# Altium PCB CPU_PCB.PcbDoc
Units mm, origin at the board's own origin, x right, y up, seen from the top; angles counter-clockwise.
Board outline 30 x 17 mm, 2 copper layers (Top Layer, Bottom Layer), stack 1.071 mm thick; 63 components, 51 nets, 168 pads, 59 vias.
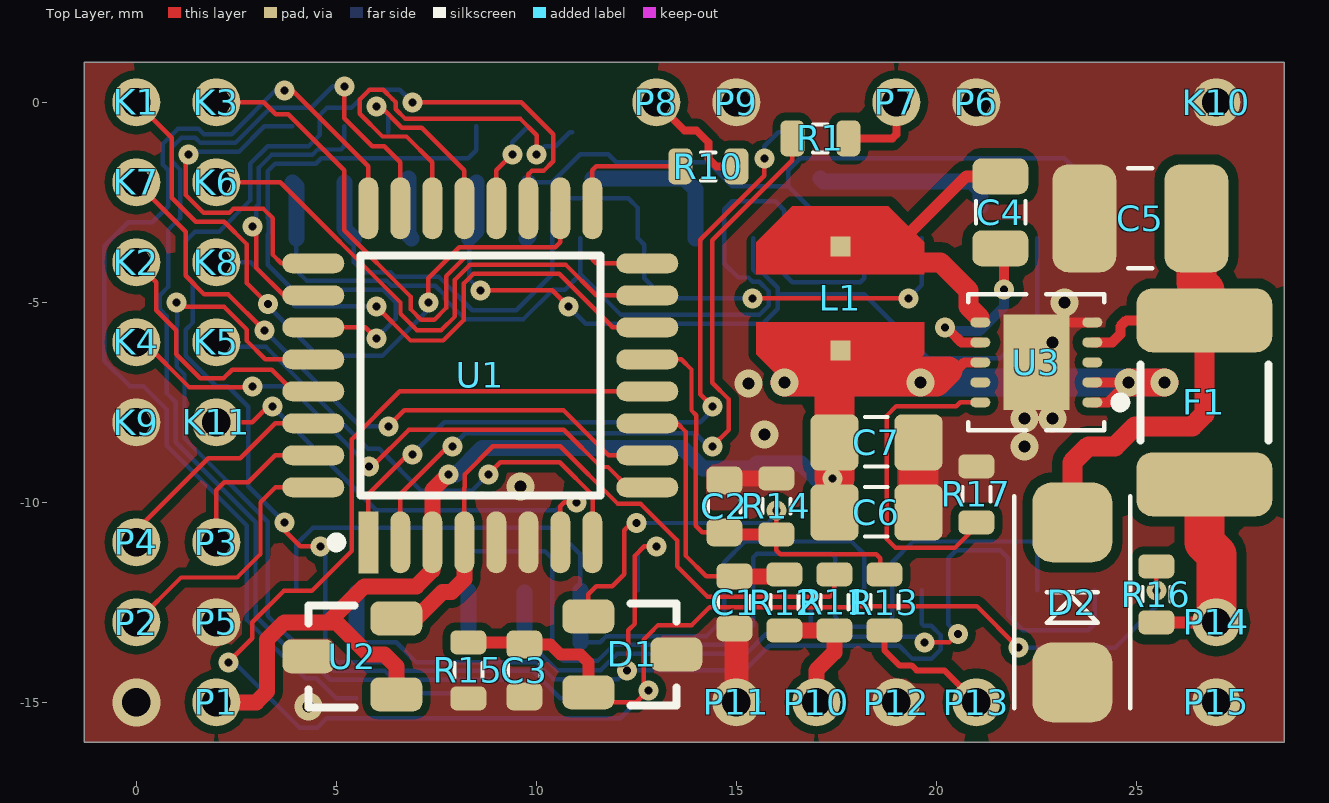
[diagram p0: Top Layer view]
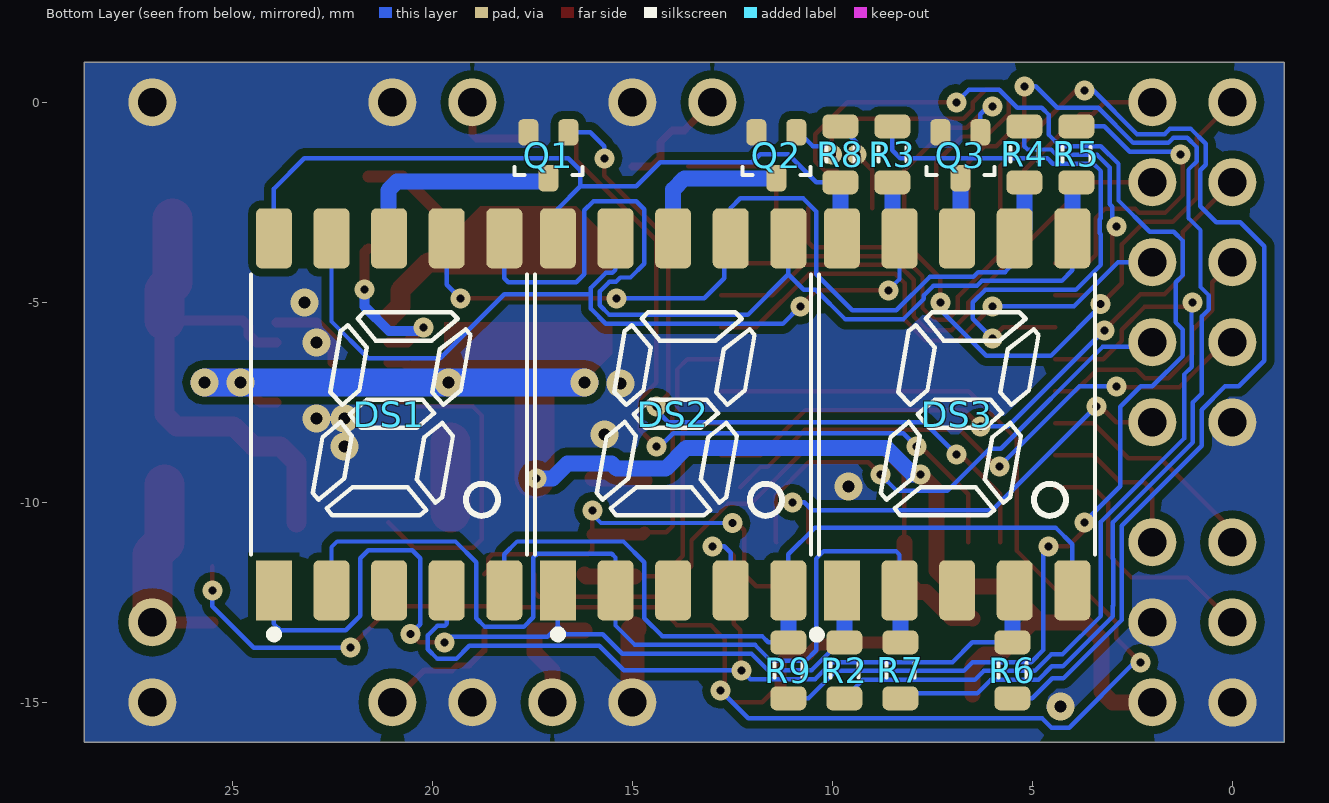
[diagram p1: Bottom Layer view, seen from below]
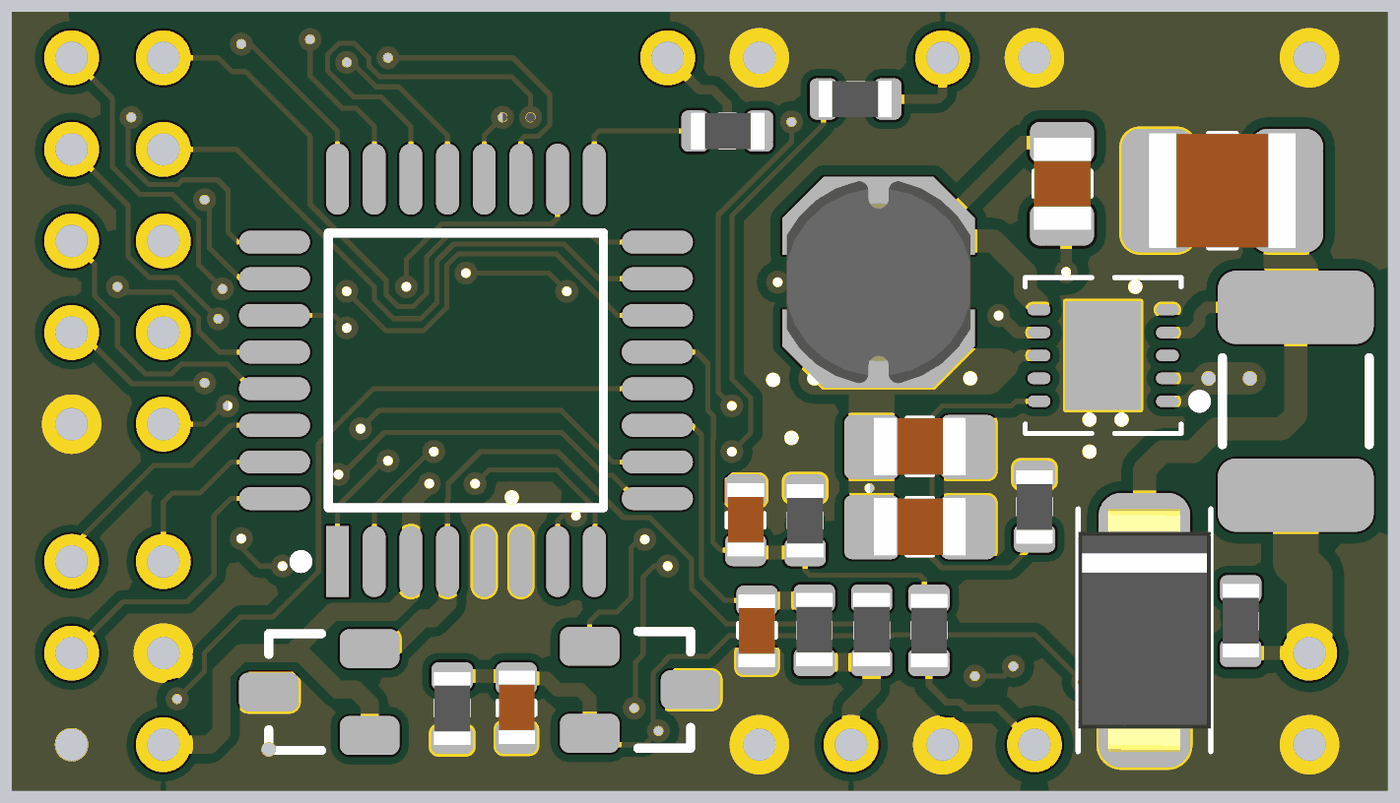
[diagram p2: 3D render of the assembled board from above, using the file's embedded part models]
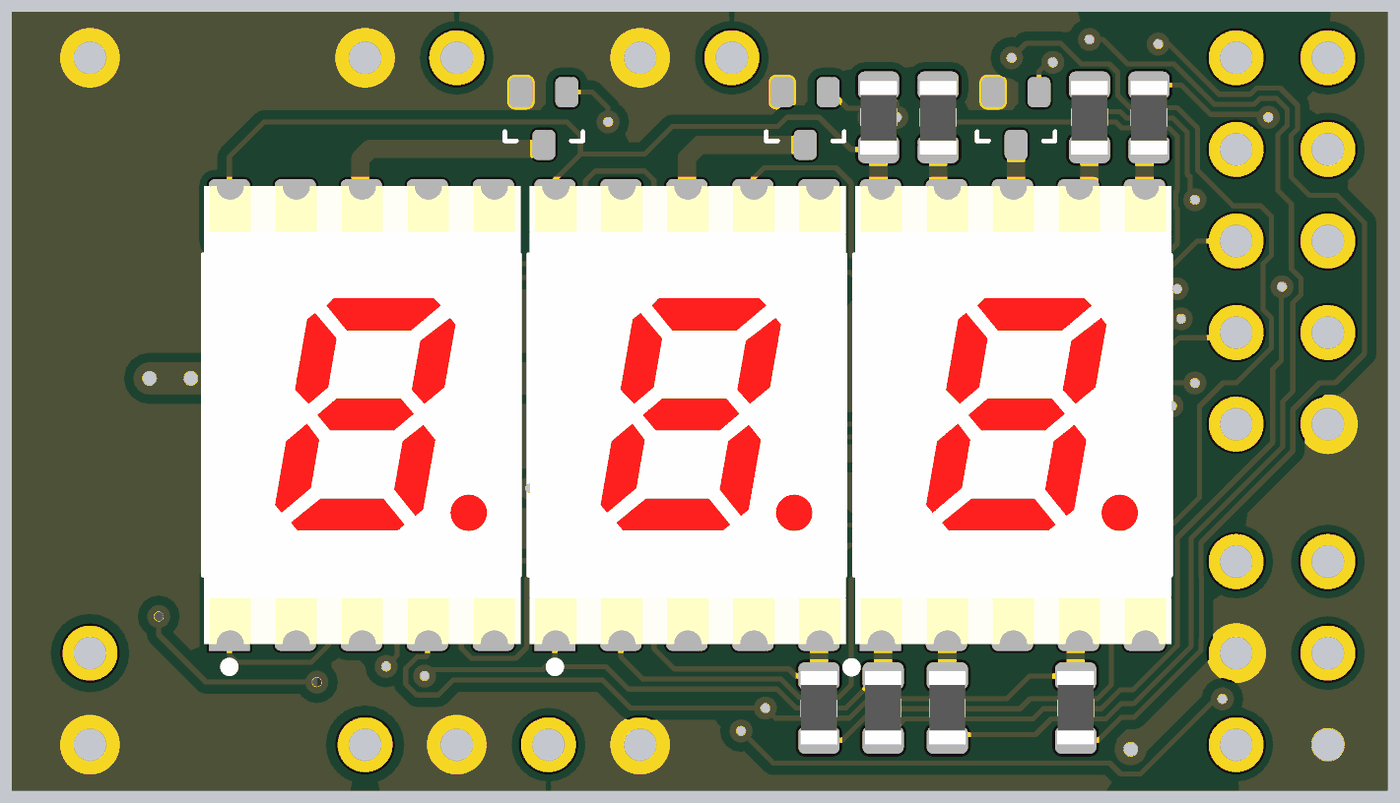
[diagram p3: 3D render of the assembled board from below, using the file's embedded part models]

## Layer stack, top to bottom
Top Solder: solder mask 0.0102, Solder Resist, Dk 3.5
Top Layer: signal copper 0.0356
Dielectric 1: dielectric 1, FR-4, Dk 4.8
Bottom Layer: signal copper 0.0356
Bottom Solder: solder mask 0.0102, Solder Resist, Dk 3.5

## Board outline
-1.3,-16 28.7,-16 28.7,1 -1.3,1

## Design rules (kind name [scope] priority, off if disabled: settings)
Clearance NET24V [All vs InNetClass('24V')] p1: gap=0.25
Clearance Poly [(InNamedPolygon('BOT_GND') OR InNamedPolygon('TOP_GND'))] p2: gap=0.2
Clearance [All] p3: gap=0.11
ComponentClearance [All] p1: gap=0.254 collisioncheckmode=3 verticalgap=0 showdistances=FALSE
HoleSize [All] p1: absolutevalues=TRUE maxlimit=3 minlimit=0.15 maxpercent=80.000 minpercent=20.000
HoleToHoleClearance [All] p1: gap=0.1 allowstackedmicrovias=TRUE
MinimumSolderMaskSliver [All] p1: minsoldermaskwidth=0
PolygonConnect [All] p1: connectstyle=Direct reliefconductorwidth=0.254 reliefentries=4 polygonreliefangle="90 Angle" airgapwidth=0.254
RoutingVias [All] p1: holewidth=0.15 width=0.4 viastyle="Through Hole" minholewidth=0.2 minwidth=0.5 maxholewidth=3 maxwidth=5
SilkToSilkClearance [All] p1: silktosilkclearance=0
SilkToSolderMaskClearance [IsPad] p1: minsilkscreentomaskgap=0 clearancetoexposedcopper=TRUE
SolderMaskExpansion [All] p1: expansion=0.05
Width [All] p1: maxlimit=5 minlimit=0.11 preferedwidth=0.11
23 further rules are at their usual default settings.

## Classes and differential pairs
net class 24V: NetC4_1 NetC4_2 NetC5_1 NetF1_1 NetP13_1

## Components (designator, comment, footprint, x,y, rotation, side; value= is the part's Value field where it differs from the comment)
C1 "CL10B102KB8NNNC" 1608[0603]#1 14.95,-12.5 r270 top
C2 "CL10B102KB8NNNC" 1608[0603]#2 14.7,-10.1 r90 top
C3 "CL10B102KB8NNNC" 1608[0603]#2 9.7,-14.2 r90 top
C4 "C0805C224K5RACTU" 2012[0805] 21.6,-2.7 r90 top
C5 "GRM32DF51H106ZA01L" 3225[1210] 25.1,-2.9 r180 top
C6 "GRM21BR60J106KE19L" 0805-1206 18.45,-10.25 r180 top
C7 "GRM21BR60J106KE19L" 0805-1206 18.45,-8.5 r180 top
D1 "ESDA6V1L" SOT23 11.3,-12.85 r270 top
D2 "SMAJ28A" SMA 23.4,-12.5 r90 top
DS1 "KCSC02-105" KCSC02-105 23.96,-3.4 r180 bottom
DS2 "KCSC02-105" KCSC02-105 16.86,-3.4 r180 bottom
DS3 "KCSC02-105" KCSC02-105 9.76,-3.4 r180 bottom
F1 "1812L110/33MR" CR4532-1812/Y1.6 26.7,-7.5 r90 top
K1 "Pin 0.7 mm" "Mount hole 0.7 mm" 0,0 r0 top net-tie
K2 "Pin 0.7 mm" "Mount hole 0.7 mm" 0,-4 r0 top net-tie
K3 "Pin 0.7 mm" "Mount hole 0.7 mm" 2,0 r0 top net-tie
K4 "Pin 0.7 mm" "Mount hole 0.7 mm" 0,-6 r0 top net-tie
K5 "Pin 0.7 mm" "Mount hole 0.7 mm" 2,-6 r0 top net-tie
K6 "Pin 0.7 mm" "Mount hole 0.7 mm" 2,-2 r0 top net-tie
K7 "Pin 0.7 mm" "Mount hole 0.7 mm" 0,-2 r0 top net-tie
K8 "Pin 0.7 mm" "Mount hole 0.7 mm" 2,-4 r0 top net-tie
K9 "Pin 0.7 mm" "Mount hole 0.7 mm" 0,-8 r0 top net-tie
K10 "Pin 0.7 mm" "Mount hole 0.7 mm" 27,0 r180 top net-tie
K11 "Pin 0.7 mm" "Mount hole 0.7 mm" 2,-8 r0 top net-tie
L1 "SDR0403-5R6ML" SDR0403 17.6,-4.9 r270 top
P1 "Pin 0.7 mm" "Mount hole 0.7 mm" 2,-15 r0 top net-tie
P2 "Pin 0.7 mm" "Mount hole 0.7 mm" 0,-13 r0 top net-tie
P3 "Pin 0.7 mm" "Mount hole 0.7 mm" 2,-11 r0 top net-tie
P4 "Pin 0.7 mm" "Mount hole 0.7 mm" 0,-11 r0 top net-tie
P5 "Pin 0.7 mm" "Mount hole 0.7 mm" 2,-13 r180 top net-tie
P6 "Pin 0.7 mm" "Mount hole 0.7 mm" 21,0 r0 top net-tie
P7 "Pin 0.7 mm" "Mount hole 0.7 mm" 19,0 r180 top net-tie
P8 "Pin 0.7 mm" "Mount hole 0.7 mm" 13,0 r180 top net-tie
P9 "Pin 0.7 mm" "Mount hole 0.7 mm" 15,0 r180 top net-tie
P10 "Pin 0.7 mm" "Mount hole 0.7 mm" 17,-15 r180 top net-tie
P11 "Pin 0.7 mm" "Mount hole 0.7 mm" 15,-15 r180 top net-tie
P12 "Pin 0.7 mm" "Mount hole 0.7 mm" 19,-15 r180 top net-tie
P13 "Pin 0.7 mm" "Mount hole 0.7 mm" 21,-15 r180 top net-tie
P14 "Pin 0.7 mm" "Mount hole 0.7 mm" 27,-13 r180 top net-tie
P15 "Pin 0.7 mm" "Mount hole 0.7 mm" 27,-15 r180 top net-tie
Q1 "2N7002T" SOT-523F 17.1,-1.325 r270 bottom
Q2 "2N7002T" SOT-523F 11.4,-1.325 r270 bottom
Q3 "2N7002T" SOT-523F 6.8,-1.325 r270 bottom
R1 "RC0603FR-07330RL" 0603 17.1,-0.9 r180 top
R2 "RC0603FR-07330RL" 0603 9.7,-14.2 r90 bottom
R3 "RC0603FR-07330RL" 0603 8.5,-1.3 r270 bottom
R4 "RC0603FR-07330RL" 0603 5.2,-1.3 r270 bottom
R5 "RC0603FR-07330RL" 0603 3.9,-1.3 r270 bottom
R6 "RC0603FR-07330RL" 0603 5.5,-14.2 r90 bottom
R7 "RC0603FR-07330RL" 0603 8.3,-14.2 r90 bottom
R8 "RC0603FR-07330RL" 0603 9.8,-1.3 r270 bottom
R9 "RC0603FR-07330RL" 0603 11.1,-14.2 r90 bottom
R10 "RC0603FR-07330RL" 0603 14.3,-1.6 r0 top
R11 "ERJ-3EKF1002V" 0603 17.45,-12.5 r90 top
R12 "RC0603FR-07330RL" 0603 16.2,-12.5 r90 top
R13 "RC0603FR-10100KL" 0603 18.7,-12.5 r270 top
R14 "RL0603K012-1" 0603 16,-10.1 r270 top
R15 "RL0603K012-1" 0603 8.3,-14.2 r270 top
R16 "RC0603FR-10100KL" 0603 25.5,-12.3 r90 top
R17 "RL0603K043-1" 0603 21,-9.8 r270 top
U1 "S9KEAZN64AMLC" "LQFP-32 Freescale" 8.6,-6.825 r90 top
U2 "ISL21080CIH341Z-TK" SOT23 6.5,-14.8 r90 top
U3 "LT3973IDD-5#PBF" "10-DFN LINEAR" 22.5,-6.5 r180 top

## Footprints (in the part's own frame and the unit in brackets; to place one, negate y for a bottom-side part, rotate by r counter-clockwise, add the part's x,y. Pads: shape width x height; smd on the part's side, far side on the other; paste and mask are expansions set on the pad)
"10-DFN LINEAR" [mm] "QFN, 10-Leads, Body 3.00x3.00mm, Pitch 0.50mm, Thermal Pad 1.65x2.38mm, IPC Medium Density"
  oval 0.5x0.25 smd: 1(-1.4,1) 2(-1.4,0.5) 3(-1.4,0) 4(-1.4,-0.5) 5(-1.4,-1) 6(1.4,-1) 7(1.4,-0.5) 8(1.4,0) 9(1.4,0.5) 10(1.4,1)
  rect 1.65x2.38 smd: 11(0,0)
  silkscreen extent -2.23,-1.7 1.7,1.7, body extent -1.55,-1.55 1.55,1.55, height 0.75
0603 [mm] "Chip Resistor; Body 1.6 x 0.8 mm (LxW typ)"
  rrect50% 0.6x0.9 smd mask+0.06: 1(-0.7,0) 2(0.7,0)
  silkscreen extent -0.18,-0.35 0.18,0.35, body extent -0.79,-0.4 0.81,0.4, height 0.45
0805-1206 [mm] "Chip Capacitor; Body 2.0 x 1.2 mm (LxW typ)"
  rrect30% 1.2x1.4 smd mask+0.05: 1(-1.1,0) 2(1,0)
  silkscreen extent -0.33,-0.64 0.23,0.61, body extent -1.05,-0.64 0.95,0.62, height 1.25
1608[0603]#1 [mm] "Chip Capacitor; Body 1.6 x 0.8 mm (LxW typ)"
  rrect50% 0.65x0.9 smd mask+0.05: 1(-0.65,0) 2(0.65,0)
  silkscreen extent -0.15,-0.41 0.15,0.41, body extent -0.79,-0.41 0.81,0.39, height 0.8
1608[0603]#2 [mm] "Chip Capacitor; Body 1.6 x 0.8 mm (LxW typ)"
  rrect50% 0.7x0.9 smd mask+0.05: 1(-0.65,0) 2(0.65,0)
  silkscreen extent -0.15,-0.41 0.15,0.41, body extent -0.79,-0.41 0.81,0.39, height 0.8
2012[0805] [mm] "Chip Capacitor; Body 2.0 x 1.2 mm (LxW typ)"
  rrect50% 0.9x1.4 smd mask+0.07: 1(-0.95,0) 2(0.85,0)
  silkscreen extent -0.33,-0.63 0.23,0.61, body extent -1.05,-0.64 0.95,0.62, height 1.25
3225[1210] [mm] "Chip Capacitor; Body 3.2 x 2.5 mm (LxW typ)"
  rrect50% 1.6x2.7 smd: 1(-1.4,0) 2(1.4,0)
  silkscreen extent -0.3,-1.25 0.3,1.25, body extent -1.6,-1.25 1.6,1.25, height 1.15
CR4532-1812/Y1.6 [mm] "Chip Resistor; Body 4.5 x 3.2 mm (LxW typ)"
  rrect50% 1.6x3.4 smd: 1(-2.05,0) 2(2.05,0)
  silkscreen extent -0.95,-1.6 0.95,1.6
KCSC02-105 [mm]
  rect 0.9x1.5 smd: 1(0,-8.8)
  rrect30% 0.9x1.5 smd: 2(1.44,-8.8) 3(2.88,-8.8) 4(4.32,-8.8) 5(5.76,-8.8) 6(5.76,0) 7(4.32,0) 8(2.88,0) 9(1.44,0) 10(0,0)
  silkscreen extent -0.57,-10 6.33,-0.9, body extent -0.55,-9.4 6.35,0.6, height 3
"LQFP-32 Freescale" [mm] "TQFP, 32-Leads, Body 7.00x7.00mm, Pitch 0.80mm, IPC Medium Density"
  rect 1.55x0.5 smd: 1(-4.175,2.8)
  oval 1.55x0.5 smd: 2(-4.175,2) 3(-4.175,1.2) 4(-4.175,0.4) 5(-4.175,-0.4) 6(-4.175,-1.2) 7(-4.175,-2) 8(-4.175,-2.8) 17(4.175,-2.8) 18(4.175,-2) 19(4.175,-1.2) 20(4.175,-0.4) 21(4.175,0.4) 22(4.175,1.2) 23(4.175,2) 24(4.175,2.8)
  oval 0.5x1.55 smd: 9(-2.8,-4.175) 10(-2,-4.175) 11(-1.2,-4.175) 12(-0.4,-4.175) 13(0.4,-4.175) 14(1.2,-4.175) 15(2,-4.175) 16(2.8,-4.175) 25(2.8,4.175) 26(2,4.175) 27(1.2,4.175) 28(0.4,4.175) 29(-0.4,4.175) 30(-1.2,4.175) 31(-2,4.175) 32(-2.8,4.175)
  silkscreen extent -4.3,-3 3,3.72, body extent -3.5,-3.5 3.5,3.5, height 1.6
"Mount hole 0.7 mm" [mm]
  round 1.2 hole 0.71: 1(0,0)
SDR0403 [mm]
  rect 0.5x0.5 smd: 1(-1.3,0) 2(1.3,0)
  Top Layer region: 0.6,-2.1 1.4,-2.1 2.3,-1.2 2.3,1.2 1.4,2.1 0.6,2.1
  Top Layer region: -0.6,2.1 -1.4,2.1 -2.3,1.2 -2.3,-1.2 -1.4,-2.1 -0.6,-2.1
  body extent -2.21,-2 2.21,2, height 3.32
SMA [mm]
  rrect50% 2x2 smd: 1(2,0) 2(-2,0)
  silkscreen extent -2.65,-1.45 2.65,1.45, body extent -2.65,-1.45 2.65,1.45, height 2.55
SOT23 [mm] "SOT-23; 3 Leads; Body 3.0 x 2.6 mm, inc. leads (LxW max)"
  rrect50% 0.85x1.3 smd: 1(0,0) 2(1.9,0) 3(0.95,2.2)
  silkscreen extent -0.32,1.05 2.23,2.2, body extent -0.3,1 2.2,2.2, height 1
SOT-523F [mm] "SOT23, 3-Leads, Body 1.7x1.7mm (max), Pitch 0.50mm, IPC Medium Density"
  rrect50% 0.66x0.5 smd: 1(-0.575,0.5) 2(-0.575,-0.5) 3(0.575,0)
  silkscreen extent 0.29,-0.85 0.49,0.85, body extent -0.49,-0.85 0.49,0.85, height 0.78

## Part data
C1 C2 C3: library part CVNF1.0K0603, "1 nF, 50V, 10%, X7R, 0603 SMD MLC Capacitor"
C4: "0.22 uF, 50V, X7R,  0805"
C5: "10uF, 50V, 20%, Y5V (F), 1210"
C6 C7: "10 uF, 6.3V, X5R, 10%, 0805"
D1: "Dual transil array for ESD, 6.1 V, 300 W"
D2: "DIODE TVS 28V 400W UNI 5% SMD"
F1: "PTC RESETTABLE 33V, 1.10A, 1812L"
L1: "SMD Power Inductor 5.6 uH, 100 mOhm, 1.6 A"
Q1 Q2 Q3: "MOSFET N-CH, 60V, 115 mA, SOT-523F-3"
R1 R2 R3 R4 R5 R6 R7 R8 R9 R10 R12: library part RL0603E330-1_1, "330 R, 1%, 0603, SMD Resistor, Taped"
R11: library part RL0603K010-1_1, "10 K, 1%, 0603, SMD Resistor, Taped"
R13 R16: library part RL0603K100-1_1, "100 K, 1%, 0603, SMD Resistor, Taped"
R14 R15: "12 K, 1%, 0603, SMD Resistor, Taped"
R17: "43 K, 1%, 0603, SMD Resistor, Taped"
U2: "Voltage References 4.096 V, Iout 7 mA, 4.5<Vin<8, Iq < 0.3uA, -40..+85 C, SOT23"
U3: "BUCK 2.2 MHz,  In 42V, Out 5V, 0.75A, -40..125C, 10-DFN"

## Via types
v1: diameter 0.5, hole 0.2, Top Layer to Bottom Layer, tented both sides, 44 vias
v2: diameter 0.7/0.7 (per signal layer), hole 0.3, Top Layer to Bottom Layer, tented both sides, 13 vias
v3: diameter 0.5/0.5 (per signal layer), hole 0.2, Top Layer to Bottom Layer, tented both sides, 1 vias
v4: diameter 1.2/1.2 (per signal layer), hole 0.71, Top Layer to Bottom Layer, 1 vias

## Nets (pads, with @x,y where several pads share a name; then routed paths per layer and width w, separated by ;. In a path a pad name is that pad's centre, name@x,y a point inside that pad or via, vN(x,y) a via of type N, cw(c..) or ccw(c..) an arc to the next point about the centre after c; other vN are vias at no path point)
+5V: C6.2 C7.2 L1.2 P1.1 U1.3 U2.1 U3.1 U3.2 U3.8 | length 46.5
  Top Layer w0.25: 20.5,-6.7 20.7,-6.5 U3.8 ; U3.1 24.3,-7.5 v2@24.7,-7.1 ; U3.2 v2@24.651,-7
  Top Layer w0.4: P1.1 3,-15 3.265,-14.735 3.265,-13.435 3.7,-13 4.8,-13 ; U2.1 6.5,-14.1 6.2,-13.8 5.8,-13.8 5,-13 4.8,-13 ; v1(7.8,-9.3) 7.4,-9.7 U1.3 7.4,-11.7 7,-12.1 5.7,-12.1 4.8,-13
  Top Layer w0.7: v2(16.2,-7) 17.45,-7 20,-7 20.3,-6.7 v2@19.55,-6.7 ; 17.45,-6.65 17.8,-7 v2(19.6,-7) ; v2(24.8,-7) v2(25.7,-7)
  Top Layer w1: v1@17.45,-9.4 C7.2 17.45,-7 17.45,-6.65
  Bottom Layer w0.4: v1(7.8,-9.3) 7.992,-9.3 8.652,-8.64 13.648,-8.64 14.168,-9.16 15.385,-9.16 15.515,-9.03 16.622,-9.03 16.992,-9.4 v1(17.4,-9.4)
  Bottom Layer w0.7: v2(16.2,-7) v2(24.8,-7) v2(25.7,-7) ; v2(19.6,-7) 20,-7
A: DS1.7 DS2.7 DS3.7 R4.2 | length 22.2
  Top Layer w0.11: v1(15.4,-4.9) v1(19.3,-4.9)
  Bottom Layer w0.11: DS3.7 5.44,-4.005 5.68,-4.245 6.354,-4.245 6.474,-4.365 7.565,-4.365 8.4,-5.2 9.5,-5.2 10.4,-4.3 10.4,-2.731 10.731,-2.4 12.3,-2.4 12.54,-2.64 DS2.7 12.7,-3.56 12.7,-4.4 13.2,-4.9 v1(15.4,-4.9) ; v1(19.3,-4.9) 19.64,-4.56 DS1.7
  Bottom Layer w0.4: R4.2 5.2,-3.16 DS3.7
B: DS1.6 DS2.6 DS3.6 R5.2 | length 26
  Bottom Layer w0.11: DS3.6 4,-4.2 4.265,-4.465 6.263,-4.465 6.383,-4.585 7.472,-4.585 7.715,-4.828 7.715,-4.915 8.22,-5.42 9.68,-5.42 10.415,-4.685 10.715,-4.685 11.1,-4.3 ; DS2.6 11.1,-4.3 ; DS1.6 18.2,-4.4 18.1,-4.5 16.4,-4.5 16.2,-4.3 16.2,-2.7 15.971,-2.471 14.9,-2.471 14.7,-2.671 14.7,-4.034 15.046,-4.38 15.304,-4.38 15.409,-4.485 15.572,-4.485 15.815,-4.728 15.815,-5.072 15.572,-5.315 12.115,-5.315 11.1,-4.3
  Bottom Layer w0.4: R5.2 4,-2.1 DS3.6
BUTTON: R10.1 U1.17 | length 3.2
  Top Layer w0.11: U1.17 11.4,-1.7 11.5,-1.6 R10.1
C: DS1.4 DS2.4 DS3.4 R6.2 | length 23.7
  Top Layer w0.11: v1(12.27,-14.2) 12.3,-14.2 12.3,-13.2 12.465,-13.035 12.465,-11.335 12.7,-11.1 v1(13,-11.1)
  Bottom Layer w0.11: R6.2 6.5,-13.5 6.995,-13.995 10.002,-13.995 10.427,-14.42 12.05,-14.42 v1(12.27,-14.2) 15.211,-14.2 15.826,-13.585 19.074,-13.585 19.404,-13.915 19.872,-13.915 20.115,-13.672 20.115,-13.328 19.872,-13.085 19.685,-13.085 19.64,-13.04 DS1.4 ; DS2.4 12.54,-11.26 12.7,-11.1 v1(13,-11.1)
  Bottom Layer w0.4: R6.2 DS3.4@5.5,-12.26
D: DS1.2 DS2.2 DS3.2 R7.2 | length 25.5
  Bottom Layer w0.11: DS3.2 8.32,-11.309 8.409,-11.22 10.213,-11.22 10.4,-11.407 10.4,-13.695 10.67,-13.965 11.531,-13.965 11.931,-13.565 14.935,-13.565 15.42,-13.08 DS2.2 15.42,-11.38 15.515,-11.285 17.378,-11.285 17.475,-11.382 17.475,-12.875 17.715,-13.115 18.685,-13.115 18.9,-12.9 18.9,-11.5 19.42,-10.98 22.38,-10.98 22.52,-11.12 DS1.2
  Bottom Layer w0.4: R7.2 DS3.2@8.3,-12.22
DP: DS1.5 DS2.5 DS3.5 R9.2 | length 20.9
  Bottom Layer w0.11: DS3.5 4,-11.049 4.409,-10.64 10.44,-10.64 11.1,-11.3 DS2.5 ; R9.2 11.6,-13.5 11.755,-13.345 14.255,-13.345 14.7,-12.9 14.7,-11.5 15.22,-10.98 17.88,-10.98 18.2,-11.3 DS1.5
  Bottom Layer w0.4: R9.2 DS2.5
E: DS1.1 DS2.1 DS3.1 R2.2 | length 22.3
  Top Layer w0.11: v1(19.7,-13.5) 20.33,-13.5 v1(20.54,-13.29)
  Bottom Layer w0.11: R2.2 9.818,-13.5 10.518,-14.2 11.607,-14.2 12.022,-13.785 15.252,-13.785 15.737,-13.3 16.66,-13.3 16.86,-13.1 ; DS2.1@16.837,-12.2 DS2.1 16.86,-13.1 ; v1(19.7,-13.5) 19.565,-13.365 17.125,-13.365 16.86,-13.1 ; v1(20.54,-13.29) 20.3,-13.05 20.3,-11.4 20.5,-11.2 21.6,-11.2 21.8,-11.4 21.8,-12.834 22.166,-13.2 23.8,-13.2 23.96,-13.04 DS1.1
  Bottom Layer w0.4: R2.2 DS3.1@9.7,-12.26
F: DS1.9 DS2.9 DS3.9 R3.2 | length 22.5
  Top Layer w0.11: v1(8.6,-4.7) 10.4,-4.7 v1(10.8,-5.1)
  Bottom Layer w0.11: DS3.9 8.32,-4.42 v1(8.6,-4.7) ; v1(10.8,-5.1) 11.235,-5.535 15.663,-5.535 16.035,-5.163 16.035,-4.8 ; DS2.9 15.42,-4.185 15.5,-4.265 15.663,-4.265 16.035,-4.637 16.035,-4.8 ; DS1.9 22.52,-5.48 21.6,-6.4 19.8,-6.4 18.2,-4.8 16.035,-4.8
  Bottom Layer w0.4: DS3.9 8.5,-3.22 R3.2
FAILS: K1.1 U1.18 | length 17.6
  Top Layer w0.11: K1.1@0,-0.2 K1.1 0.885,-0.885 0.885,-2.385 1.485,-2.985 2.198,-2.985 2.765,-3.552 2.765,-4.522 v1(3.29,-5.047) ; v1(7.3,-5) 7.3,-4.4 8.075,-3.625 10.475,-3.625 10.6,-3.5 U1.18
  Bottom Layer w0.11: v1(3.29,-5.047) 3.222,-4.978 3.2,-5 4.535,-6.335 6.152,-6.335 7.3,-5.187 v1(7.3,-5)
G: DS1.10 DS2.10 DS3.10 R8.2 | length 19.8
  Bottom Layer w0.11: R8.2 10.4,-2 11.1,-1.3 11.8,-1.3 12,-1.5 14.3,-1.5 14.9,-2.1 16.3,-2.1 ; DS2.10 16.86,-2.66 16.3,-2.1 ; DS1.10 23.96,-2.16 23.2,-1.4 16.6,-1.4 16.3,-1.7 16.3,-2.1
  Bottom Layer w0.4: DS3.10 9.8,-3.36 R8.2
GND: C1.2 C2.2 C3.1 C5.2 C6.1 C7.1 D1.3 D2.2 K9.1 K10.1 P5.1 P6.1 P9.1 P11.1 P12.1 P15.1 Q1.2 Q2.2 Q3.2 R14.1 R15.2 R17.1 U1.5 U1.6 U2.3 U3.5 U3.11 | length 7.1
  Top Layer w0.25: U3.11 22.5,-5.9 22.9,-5.5 U3.5
  Top Layer w0.4: C2.2 14.75,-9.4 R14.1
  Top Layer w0.6: C1.2 15,-13.2 P11.1
  Top Layer w1: C6.1 C7.1
  other v2: 4.3,-15.1 9.6,-9.6 22.2,-8.6 15.7,-8.3 22.2,-7.9 22.9,-7.9 15.3,-7.033 22.9,-6 23.2,-5
  other v4: 0,-15
K1: DS1.8 Q1.3 | length 4.5
  Bottom Layer w0.4: Q1.3 17.185,-1.985 20.885,-1.985 21.1,-2.2 21.1,-2.6
K1P: Q1.1 U1.1 | length 19.1
  Top Layer w0.11: U1.1 5.8,-9.8 6.8,-8.8 v1(6.9,-8.8) ; v1(14.4,-7.6) 14.1,-7.3 14.1,-3.436 15.7,-1.836 v1(15.7,-1.4)
  Bottom Layer w0.11: v1(6.9,-8.8) 7.7,-8 14.1,-8 14.4,-7.7 v1(14.4,-7.6) ; v1(15.7,-1.4) 15.7,-1.1 16.05,-0.75 Q1.1
K2: DS2.8 Q2.3 | length 3.9
  Bottom Layer w0.4: Q2.3 13.7,-1.9 13.98,-2.18 DS2.8
K2P: Q2.1 U1.22 | length 10.5
  Top Layer w0.11: U1.22 7.4,-1.5 6.755,-0.855 6.155,-0.855 5.585,-0.285 5.585,0.072 5.828,0.315 6.172,0.315 6.415,0.072 6.415,0.07 6.485,0 6.485,-0.172 6.728,-0.415 9.604,-0.415 10.01,-0.821 v1(10.01,-1.3)
  Bottom Layer w0.11: v1(10.01,-1.3) 10.21,-1.1 10.485,-1.1 10.835,-0.75 Q2.1
K3: DS3.8 Q3.3 | length 1.5
  Bottom Layer w0.4: Q3.3 6.8,-3.32 DS3.8
K3P: Q3.1 U1.21 | length 4.6
  Top Layer w0.11: v1(6,-0.1) 6.102,-0.1 6.637,-0.635 7.135,-0.635 8.2,-1.7 U1.21
  Bottom Layer w0.11: v1(6,-0.1) 6.1,-0.1 6.3,-0.3 Q3.1
LED: R1.2 U1.2 | length 18.6
  Top Layer w0.11: U1.2 6.6,-9.8 7.8,-8.6 v1(7.9,-8.6) ; v1(14.4,-8.6) 14.815,-8.185 14.815,-7.428 14.4,-7.013 14.4,-3.447 16.4,-1.447 R1.2
  Bottom Layer w0.11: v1(7.9,-8.6) 8.225,-8.275 13.975,-8.275 14.3,-8.6 v1(14.4,-8.6)
MON: K8.1 U1.14 | length 13.4
  Top Layer w0.11: v1(6,-5.1) 6.855,-5.955 7.674,-5.955 8.185,-5.444 8.185,-4.528 8.428,-4.285 10.572,-4.285 11.9,-5.613 11.9,-5.625 U1.14
  Bottom Layer w0.11: K8.1 2.858,-4 3.958,-5.1 v1(6,-5.1)
NetC4_1: C4.1 U3.7 | length 3.9
  Top Layer w0.25: v1@20.366,-5.74 20.625,-6 U3.7 ; C4.1 21.692,-3.742 v3(21.692,-4.674)
  Bottom Layer w0.25: v1@20.371,-5.715 21.085,-5.715 21.692,-5.108 v3(21.692,-4.674)
  other v1: 20.218,-5.63
NetC4_2: C4.2 L1.1 U3.6 | length 7.1
  Top Layer w0.25: 21.075,-5.375 21.075,-5.475 U3.6
  Top Layer w0.3: 17.9,-3.6 19,-3.6 20.75,-1.85 C4.2
  Top Layer w0.5: 19.3,-4 20.1,-4 20.8,-4.7 20.8,-5.1 21.075,-5.375
NetC5_1: C5.1 D2.1 F1.2 U3.4 | length 13.4
  Top Layer w0.25: U3.4 24.4,-6 24.6,-5.8 24.6,-5.6 24.75,-5.45 F1.2
  Top Layer w0.5: D2.1 23.4,-9 23.8,-8.6 24.465,-8.6 24.965,-8.1 26.4,-8.1 26.7,-7.8 F1.2
  Top Layer w1: C5.1 26.5,-4.5 26.7,-4.7 F1.2
NetF1_1: F1.1 P14.1 R16.1 | length 5.1
  Top Layer w0.3: R16.1 P14.1
  Top Layer w1: F1.1 26.7,-11 27,-11.3 P14.1
NetK11_1: K11.1 U1.7 | length 11.8
  Top Layer w0.11: K11.1 2.9,-8 3.4,-7.5 v1(3.4,-7.6) ; U1.7 10.6,-10.1 10.7,-10 v1(11,-10)
  Bottom Layer w0.11: v1(3.4,-7.6) 6,-10.2 10.5,-10.2 10.7,-10 v1(11,-10)
NetP7_1: P7.1 R1.1 | length 2
  Top Layer w0.2: R1.1 18.9,-0.9 19,-0.8 P7.1
NetP8_1: P8.1 R10.2 | length 2.9
  Top Layer w0.2: P8.1 13.7,-0.7 14,-0.7 14.3,-1 14.3,-1.4 14.5,-1.6 R10.2
NetP10_1: P10.1 R11.1 R12.1 | length 3.2
  Top Layer w0.4: R12.1 R11.1 17.45,-13.75 17,-14.2 P10.1
NetP13_1: P13.1 R13.2 | length 3.3
  Top Layer w0.15: R13.2 18.7,-13.7 19.075,-14.075 19.383,-14.075 19.508,-14.2 20.2,-14.2 P13.1
NetR2_1: R2.1 U1.28 | length 20.3
  Top Layer w0.11: v1(1,-5) 1.114,-5.114 2.196,-5.114 2.765,-5.683 2.765,-5.965 3.225,-6.425 U1.28
  Bottom Layer w0.11: v1(1,-5) 1.02,-5 1.02,-5.587 1.015,-5.592 1.015,-6.615 1.205,-6.805 1.205,-8.405 3.285,-10.485 3.285,-12.839 4.246,-13.8 4.522,-13.8 4.937,-14.215 6.215,-14.215 6.435,-14.435 9.235,-14.435 R2.1
NetR3_1: R3.1 U1.27 | length 14.8
  Top Layer w0.11: U1.27 5.725,-5.625 v1(6,-5.9)
  Bottom Layer w0.11: v1(6,-5.9) 6.487,-5.413 6.487,-5 6.172,-4.685 3.911,-4.685 3.285,-4.059 3.285,-3.302 3.315,-3.272 3.315,-2.928 3.285,-2.898 3.285,-1.72 3.47,-1.535 4.487,-1.535 4.622,-1.4 8.3,-1.4 8.5,-1.2 R3.1
NetR4_1: R4.1 U1.26 | length 7.3
  Top Layer w0.11: v1(2.9,-3.1) 3,-3.1 3,-4.142 3.683,-4.825 U1.26
  Bottom Layer w0.11: v1(2.9,-3.1) 3,-3.1 3,-2.611 3.065,-2.546 3.065,-1.628 3.378,-1.315 4.396,-1.315 4.531,-1.18 5.12,-1.18 5.2,-1.1 R4.1
NetR5_1: R5.1 U1.25 | length 9.1
  Top Layer w0.11: v1@1.235,-1.3 1.235,-2.317 1.683,-2.765 2.324,-2.765 2.424,-2.665 3.18,-2.665 3.415,-2.9 3.415,-3.815 3.625,-4.025 U1.25
  Bottom Layer w0.11: v1(1.3,-1.3) 1.365,-1.235 2.565,-1.235 3.2,-0.6 ; 3.2,-0.6 R5.1 3.2,-0.6
NetR6_1: R6.1 U1.24 | length 25.8
  Top Layer w0.11: v1(3.7,0.3) 3.9,0.3 4.2,0 4.6,-0.4 5.8,-1.6 U1.24
  Bottom Layer w0.11: v1(3.7,0.3) 3.478,0.3 2.383,-0.795 1.693,-0.795 1.563,-0.665 1.035,-0.665 0.665,-1.035 0.665,-1.563 0.8,-1.698 0.8,-2.6 0.4,-3 -0.2,-3 -0.8,-3.6 -0.8,-6.46 -0.16,-7.1 0.182,-7.1 0.765,-7.683 0.765,-8.587 2.765,-10.587 2.765,-11.317 2.76,-11.322 2.76,-12.678 2.765,-12.683 2.765,-12.942 4.223,-14.4 4.5,-14.4 5,-14.9 R6.1
NetR7_1: R7.1 U1.23 | length 28.1
  Top Layer w0.11: v1(5.2,0.4) 5.2,-0.4 5.9,-1.1 6.2,-1.1 6.6,-1.5 U1.23
  Bottom Layer w0.11: v1(5.2,0.4) 4.911,0.4 4.376,-0.135 3.354,-0.135 2.474,-1.015 1.602,-1.015 1.472,-0.885 1.128,-0.885 0.885,-1.128 0.885,-1.472 1.094,-1.681 1.094,-2.894 0.795,-3.194 0.795,-4.618 0.585,-4.828 0.585,-5.172 0.765,-5.352 0.765,-7.28 0.985,-7.5 0.985,-8.496 2.985,-10.496 2.985,-11.408 2.98,-11.413 2.98,-12.587 2.985,-12.592 2.985,-12.85 4.235,-14.1 4.511,-14.1 4.846,-14.435 6.035,-14.435 6.377,-14.777 8.3,-14.777 R7.1
NetR8_1: R8.1 U1.20 | length 2.4
  Top Layer w0.11: U1.20 9,-1.7 v1(9.4,-1.3)
  Bottom Layer w0.11: v1(9.4,-1.3) 9.4,-1 R8.1
NetR9_1: R9.1 U1.19 | length 33.5
  Top Layer w0.11: v1(3.7,-10.5) 3.7,-10.7 4.1,-11.1 v1(4.6,-11.1) ; v1(6.9,0) 9.625,0 10.425,-0.8 10.425,-1.472 10.182,-1.715 9.885,-1.715 9.8,-1.8 U1.19
  Bottom Layer w0.11: v1(3.7,-10.5) 2.8,-9.6 2.8,-7.611 2.289,-7.1 2,-7.1 1.235,-6.335 1.235,-5.683 1.415,-5.503 1.415,-4.497 1.235,-4.317 1.235,-3.465 1.465,-3.235 2.065,-3.235 2.845,-2.455 2.845,-1.537 3.287,-1.095 4.305,-1.095 4.585,-0.815 4.585,-0.315 4.765,-0.135 5.378,-0.135 5.828,0.315 6.585,0.315 v1(6.9,0) ; v1(4.6,-11.1) 4.725,-11.225 4.725,-13.692 5.028,-13.995 6.495,-13.995 6.715,-14.215 9.911,-14.215 10.596,-14.9 R9.1
NetR17_2: R17.2 U3.10 | length 8.3
  Top Layer w0.11: R17.2@21.1,-10.5 20.465,-11.135 18.979,-11.135 18.765,-10.921 18.765,-7.829 18.994,-7.6 20.5,-7.6 20.6,-7.5 U3.10
PWM: K2.1 U1.29 | length 6.7
  Top Layer w0.11: K2.1 0.5,-4.5 0.5,-5.2 1,-5.7 1,-6.3 1.6,-6.9 2.182,-6.9 2.397,-6.685 3.385,-6.685 3.925,-7.225 U1.29
RESET: P3.1 U1.31 | length 4.1
  Top Layer w0.11: P3.1 2,-9.7 2.2,-9.5 2.8,-9.5 3.475,-8.825 U1.31
RST: K5.1 U1.8 | length 12.8
  Top Layer w0.11: v1(8.8,-9.3) 9.1,-9 10.587,-9 11.415,-9.828 11.415,-10.985 U1.8
  Bottom Layer w0.11: K5.1 2.115,-6.115 3.245,-6.115 5.791,-8.661 6.071,-8.661 7.124,-9.715 8.385,-9.715 v1(8.8,-9.3)
SPI_CS: K4.1 U1.9 | length 14.6
  Top Layer w0.11: K4.1 0.2,-6 1.32,-7.12 2.88,-7.12 v1(2.9,-7.1) ; v1@5.8,-9.1 v1(5.82,-9.1) 5.9,-9.1 6.815,-8.185 10.685,-8.185 11.618,-9.118 11.793,-9.118 U1.9@12.3,-9.625
  Bottom Layer w0.11: v1(2.9,-7.1) 3.82,-7.1 v1(5.82,-9.1)
SPI_MISO: K7.1 U1.10 | length 16.6
  Top Layer w0.11: K7.1 1.235,-3.235 1.235,-4.335 1.695,-4.795 2.295,-4.795 v1(3.2,-5.7) ; v1(6.3,-8.1) 6.7,-7.7 10.68,-7.7 11.805,-8.825 U1.10
  Bottom Layer w0.11: v1(3.2,-5.7) 5.6,-8.1 v1(6.3,-8.1)
SPI_MOSI: K6.1 U1.15 | length 14
  Top Layer w0.11: K6.1 3.6,-2 6.605,-5.005 6.605,-5.288 7.012,-5.695 7.623,-5.695 7.965,-5.353 7.965,-4.437 8.337,-4.065 10.74,-4.065 11.5,-4.825 U1.15
SPI_SCK: K3.1 U1.16 | length 15.3
  Top Layer w0.11: K3.1 3.187,0 3.487,-0.3 3.8,-0.3 5.2,-1.7 5.2,-3.2 6.865,-4.865 6.865,-5.18 7.12,-5.435 7.452,-5.435 7.745,-5.142 7.745,-4.346 8.246,-3.845 11.32,-3.845 11.5,-4.025 U1.16
SWD_CLK: P4.1 U1.30 | length 5.8
  Top Layer w0.11: P4.1 0,-10.7 1.8,-8.9 2.6,-8.9 3.475,-8.025 U1.30
SWD_DIO: P2.1 U1.32 | length 6.6
  Top Layer w0.11: P2.1 1.12,-11.88 2.52,-11.88 3.105,-11.295 3.105,-10 3.48,-9.625 U1.32
TEMPER: C1.1 R12.2 U1.11 | length 6.8
  Top Layer w0.11: U1.11 13.525,-8.025 13.74,-8.24 13.74,-11.34 14.25,-11.85 C1.1
  Top Layer w0.4: C1.1 16.15,-11.85 R12.2
VAN: C2.1 D1.1 R13.1 R14.2 U1.13 | length 18.2
  Top Layer w0.11: D1.1 11.3,-12.3 11.5,-12.1 11.9,-12.1 12.2,-11.8 12.2,-10.7 12.382,-10.518 v1(12.5,-10.518) ; U1.13 13.625,-6.425 13.88,-6.68 13.88,-7.702 14,-7.822 14,-8.313 13.985,-8.328 13.985,-10.585 14.15,-10.75 C2.1 ; v1(16,-10.2) R14.2 16,-11.2 16.1,-11.3 18.5,-11.3 18.6,-11.4 18.6,-11.7 R13.1
  Top Layer w0.3: C2.1 14.75,-10.8 R14.2
  Bottom Layer w0.11: v1(12.5,-10.518) 15.782,-10.518 16,-10.3 v1(16,-10.2)
VDDA: R11.2 U1.4 U2.2 | length 16.7
  Top Layer w0.11: U1.4 8.2,-9.64 8.215,-9.625 8.215,-9.298 8.913,-8.6 10.6,-8.6 12.04,-10.04 12.609,-10.04 13.52,-10.951 13.52,-11.6 14.28,-12.36 17.34,-12.36 17.45,-12.25 R11.2
  Top Layer w0.4: U2.2 6.51,-12.89 7.01,-12.89 7.66,-12.24 7.881,-12.24 8.2,-11.921 U1.4
VOLTAGE: C3.2 D1.2 R15.1 R16.2 U1.12 | length 48.7
  Top Layer w0.11: v1(2.3,-14) 2.9,-13.4 2.9,-13 3.685,-12.215 4.385,-12.215 5.385,-11.215 5.385,-8.428 6.588,-7.225 U1.12 ; D1.2 11.5,-14.75 11.75,-15 12.5,-15 v1(12.8,-14.7) 12.685,-14.585 12.685,-14.402 12.685,-14.169 12.685,-13.431 12.92,-13.196 12.92,-13.191 13.041,-13.07 13.885,-13.07 14.335,-12.62 17.9,-12.62 17.925,-12.595 21.013,-12.595 v1(22.051,-13.633) ; v1(25.5,-12.2) R16.2
  Top Layer w0.3: R15.1 9.65,-13.5 C3.2 10.35,-13.55 10.6,-13.8 11.1,-13.8 11.3,-14 D1.2
  Bottom Layer w0.11: v1(2.3,-14) 2.443,-14 4.078,-15.635 4.522,-15.635 4.757,-15.4 12.1,-15.4 v1(12.8,-14.7) ; v1(22.051,-13.633) 24.467,-13.633 25.5,-12.6 v1(25.5,-12.2)
pads on no net: DS1.3 DS2.3 DS3.3 U3.3 U3.9

## Polygon pours and split planes (outlines as drawn)
GND on Bottom Layer "BOT_GND" (solid, remove dead copper, pour order 2): -1.3,1 -1.3,-16 28.7,-16 28.7,1
GND on Top Layer "TOP_GND" (solid, remove dead copper, pour order 4): -1.3,1 -1.3,-16 28.7,-16 28.7,1

## Silkscreen, mask and mechanical layers (free items; w line width, h text height)
Mechanical 1:
  the board outline again, w0.11
Mechanical 3:
  text "P8" at 12.4,1.7 h0.6
  text "P9" at 14.3,1.7 h0.6
  text "P7" at 18.5,1.7 h0.6
  text "P6" at 20.4,1.7 h0.6
  text "K1" at -5.2,-0.3 h0.6
  text "K3" at -3.2,-0.3 h0.6
  text "K10" at 29.2,-0.3 h0.6
  text "K7" at -5.2,-2.2 h0.6
  text "K6" at -3.2,-2.2 h0.6
  text "K2" at -5.2,-4.2 h0.6
  text "K8" at -3.2,-4.2 h0.6
  text "K4" at -5.2,-6.3 h0.6
  text "K5" at -3.2,-6.3 h0.6
  text "K9" at -5.2,-8.2 h0.6
  text "K11" at -3.2,-8.2 h0.6
  text "P4" at -5.2,-11.2 h0.6
  text "P3" at -3.2,-11.2 h0.6
  text "P2" at -5.2,-13.2 h0.6
  text "P5" at -3.2,-13.2 h0.6
  text "P14" at 29.1,-13.5 h0.6
  text "P1" at -3.2,-15.3 h0.6
  text "P15" at 29.1,-15.3 h0.6
  text "P11" at 14.3,-17.2 h0.6
  text "P10" at 16.4,-17.2 h0.6
  text "P12" at 18.5,-17.2 h0.6
  text "P13" at 20.5,-17.2 h0.6